# EAGLE board Board (EAGLE 9.6.2)
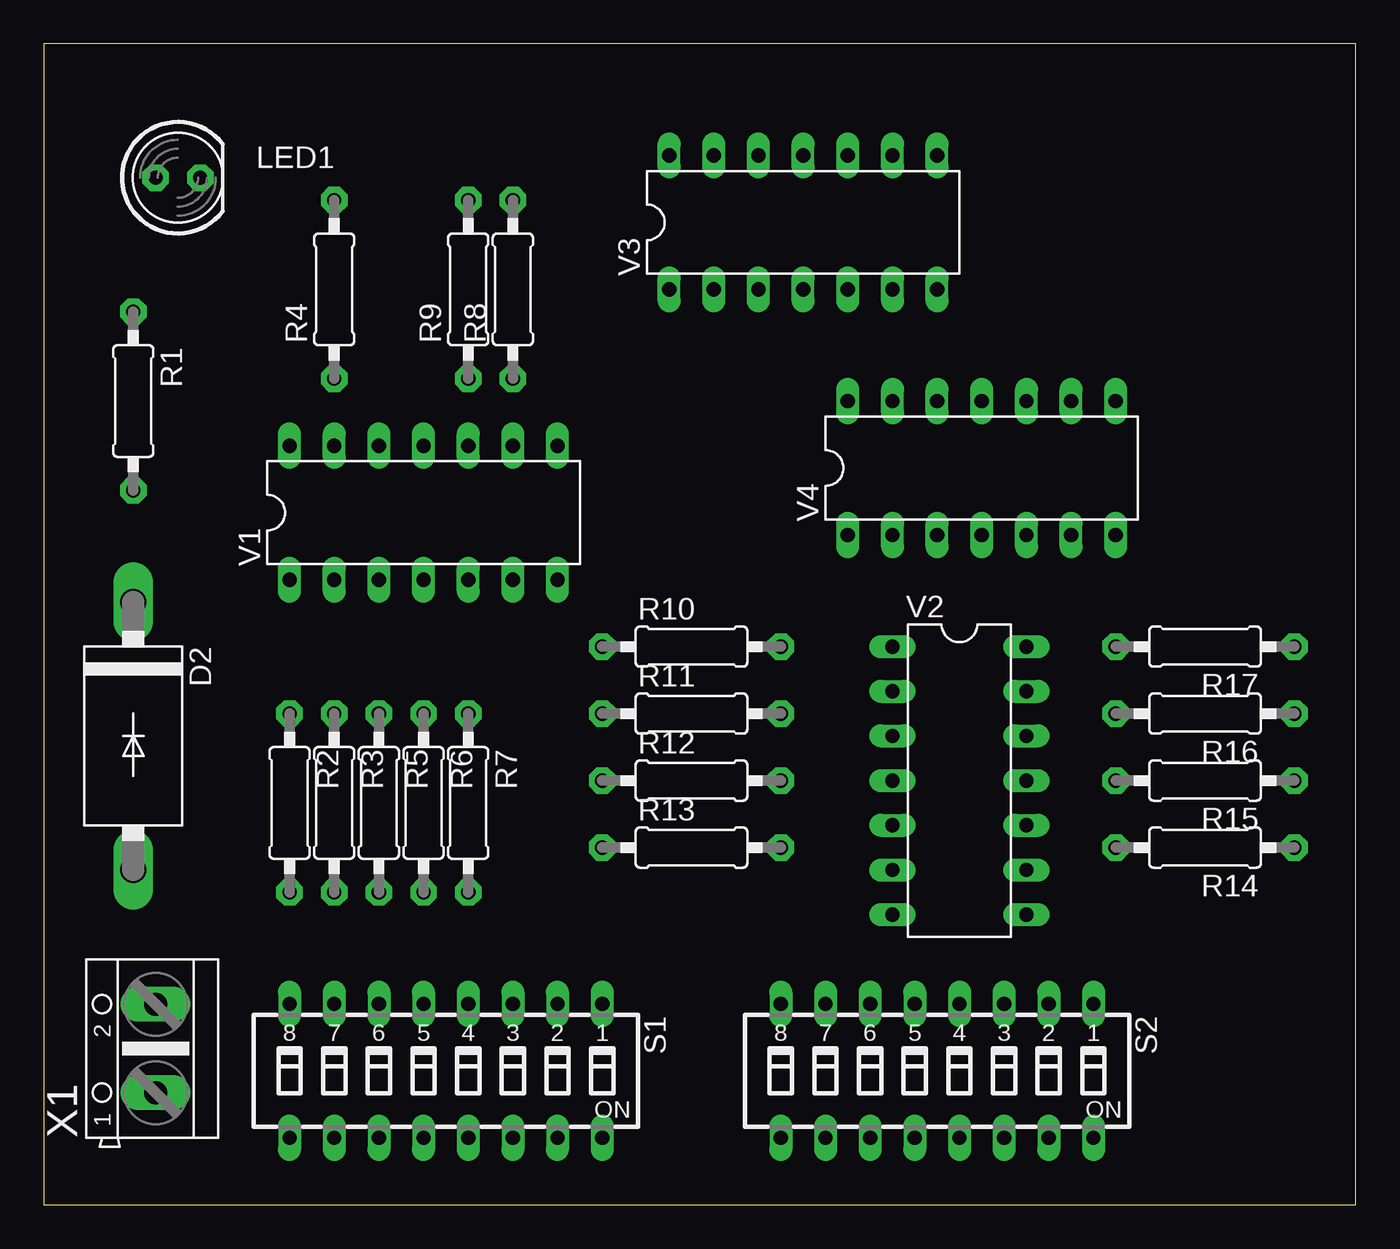
[diagram p0: board, top side]
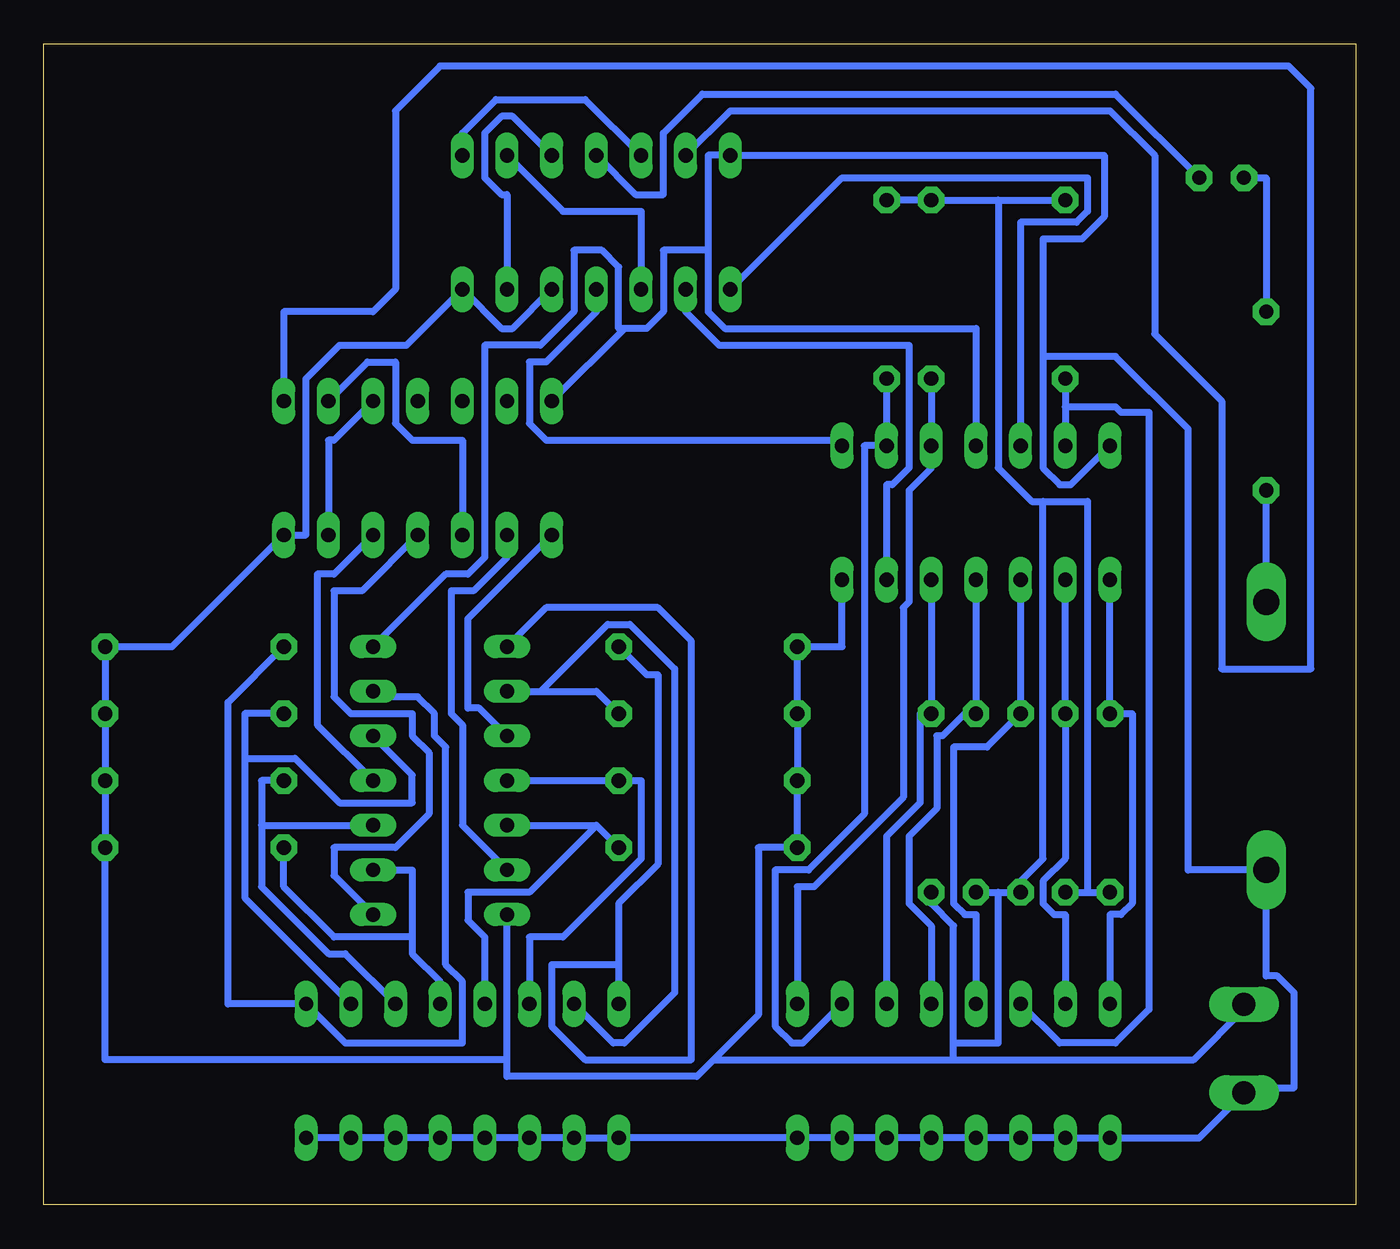
[diagram p1: board, bottom side, seen from below]

Size 74.6 x 66.03 mm. Coordinates in mm from the lower left corner, seen from the top.
Outline: 0,0 74.6,0 74.6,66.03 0,66.03 0,0
Copper layers (1*16): Top 0.035mm / dielectric 1.5mm / Bottom 0.035mm
Design rules "default *": minimum track width 0.4mm, minimum drill 0.35mm, track to track 0.4mm, track to pad 0.4mm, pad to pad 0.4mm, via to via 0.4mm, smd to smd 6mil, copper to edge 40mil, drill to drill 6mil, minimum pad ring 10mil, minimum via ring 8mil, stop-mask expansion 4mil, vias tented up to drill 0mil, thermal gap 10mil

## Footprints (pad centres in the part's own frame; a part is rotated, then mirrored left to right if it is on the bottom)
DO201-15 = drill 1.499 long: A 7.62,0; C -7.62,0
LED5MM = drill 0.813 octagon: A -1.27,0; K 1.27,0
0207/10 = drill 0.813 octagon: 1 -5.08,0; 2 5.08,0
SD4-08 = drill 0.813 long: 1 -8.89,-3.81; 2 -6.35,-3.81; 3 -3.81,-3.81; 4 -1.27,-3.81; 5 1.27,-3.81; 6 3.81,-3.81; 7 6.35,-3.81; 8 8.89,-3.81; 9 8.89,3.81; 10 6.35,3.81; 11 3.81,3.81; 12 1.27,3.81; 13 -1.27,3.81; 14 -3.81,3.81; 15 -6.35,3.81; 16 -8.89,3.81
DIL14 = drill 0.813 long: 1 -7.62,-3.81; 2 -5.08,-3.81; 3 -2.54,-3.81; 4 0,-3.81; 5 2.54,-3.81; 6 5.08,-3.81; 7 7.62,-3.81; 8 7.62,3.81; 9 5.08,3.81; 10 2.54,3.81; 11 0,3.81; 12 -2.54,3.81; 13 -5.08,3.81; 14 -7.62,3.81
AK500/2 = drill 1.321 long: 1 -2.515,0; 2 2.515,0

## Placement (x,y rotation side)
D2  1N5624  [DO201-15]  5.08,26.67 270 top
LED1  [LED5MM]  7.62,58.42 0 top
R1  [0207/10]  5.08,45.72 270 top
R2  [0207/10]  13.97,22.86 270 top
R3  [0207/10]  16.51,22.86 270 top
R4  [0207/10]  16.51,52.07 90 top
R5  [0207/10]  19.05,22.86 270 top
R6  [0207/10]  21.59,22.86 270 top
R7  [0207/10]  24.13,22.86 270 top
R8  [0207/10]  26.67,52.07 90 top
R9  [0207/10]  24.13,52.07 90 top
R10  [0207/10]  36.83,31.75 0 top
R11  [0207/10]  36.83,27.94 0 top
R12  [0207/10]  36.83,24.13 0 top
R13  [0207/10]  36.83,20.32 0 top
R14  [0207/10]  66.04,20.32 180 top
R15  [0207/10]  66.04,24.13 180 top
R16  [0207/10]  66.04,27.94 180 top
R17  [0207/10]  66.04,31.75 180 top
S1  [SD4-08]  22.86,7.62 180 top
S2  [SD4-08]  50.8,7.62 180 top
V1  7410N  [DIL14]  21.59,39.37 0 top
V2  7432N  [DIL14]  52.07,24.13 270 top
V3  7432N  [DIL14]  43.18,55.88 0 top
V4  7432N  [DIL14]  53.34,41.91 0 top
X1  [AK500/2]  6.35,8.89 90 top

## Library data of the parts
D2 = diode
LED1 = led
R1-R17 = rcl; SPICEPREFIX: R
S1 S2 = switch-dil; OC_FARNELL: unknown; OC_NEWARK: unknown
V1-V4 = 74ttl-din
X1 = con-ptr500; OC_FARNELL: unknown; OC_NEWARK: unknown

## Nets
+UB: D2.A S1.9 S1.10 S1.11 S1.12 S1.13 S1.14 S1.15 S1.16 S2.9 S2.10 S2.11 S2.12 S2.13 S2.14 S2.15 S2.16 V1.11 V1.14 V2.14 V3.14 V4.14 X1.1
-UB: R2.2 R3.2 R4.2 R5.2 R6.2 R7.2 R8.2 R9.2 R10.1 R11.1 R12.1 R13.1 R14.1 R15.1 R16.1 R17.1 V1.7 V2.7 V3.5 V3.7 V4.7 X1.2
A0: R2.1 S1.8 V1.1
A1: R3.1 S1.7 V1.2
A2: R10.2 S2.8 V2.1
A3: R11.2 S2.7 V2.2
A4: R12.2 S2.6 V2.4
A5: R4.1 S1.6 V1.13
A6: R13.2 S2.5 V2.5
A7: R14.2 S2.4 V2.9
A8: R5.1 S1.5 V1.3
A9: R6.1 S1.4 V1.4
A10: R7.1 S1.3 V1.5
A11: R8.1 S1.2 V1.9
A12: R9.1 S1.1 V1.10
A13: R15.2 S2.3 V2.10
A14: R16.2 S2.2 V2.12
A15: R17.2 S2.1 V2.13
N$1: LED1.K V3.11
N$2: LED1.A R1.1
N$3: D2.C R1.2
N$9: V2.3 V4.1
N$10: V2.6 V4.2
N$11: V2.8 V4.4
N$12: V2.11 V4.5
N$13: V4.3 V4.9
N$14: V4.6 V4.10
N$15: V1.12 V3.1
N$16: V1.6 V3.2
N$17: V1.8 V3.4
N$18: V3.3 V3.9
N$19: V3.6 V3.10
N$20: V3.8 V3.12
N$21: V3.13 V4.8

## Tracks (layer width: path | path; a pad name or v marks a point on that pad's centre or on a via)
+UB
  Bottom 0.4: V1.14 16.19,40.96 16.83,40.96 17.78,41.91 17.78,48.26 | 17.78,48.26 17.78,54.93 15.56,54.93 14.29,56.2 14.29,59.69 V3.14 36.83,59.69 36.83,54.29 | V1.11 21.59,49.85 35.88,49.85 36.83,50.8 36.83,54.29 | 41.59,49.85 V4.14 | 41.59,49.85 40.32,49.85 39.37,50.8 39.37,54.29 36.83,54.29 | V2.14 51.75,35.88 50.48,35.88 49.53,36.83 49.53,48.9 46.36,48.9 44.45,50.8 44.45,54.29 42.86,54.29 41.91,53.34 41.91,49.85 41.59,49.85 | S2.16 S2.15 S2.14 S2.13 S2.12 S2.11 S2.10 S2.9 S1.16 S1.15 S1.14 S1.13 S1.12 S1.11 S1.10 S1.9 8.89,3.81 6.35,6.35 X1.1 6.35,6.67 3.49,6.67 3.49,12.06 4.45,13.02 5.08,13.02 D2.A 9.53,19.05 9.53,44.13 13.65,48.26 17.78,48.26
-UB
  Bottom 0.4: V3.5 47.94,49.85 48.58,49.85 V3.7 53.97,48.9 57.78,48.9 59.69,46.99 59.69,38.1 V4.7 67.31,31.75 R17.1 R16.1 R15.1 R14.1 71.12,8.26 48.26,8.26 | R3.2 15.24,17.78 | 15.24,17.78 R2.2 | 20.32,57.15 R9.2 R8.2 | 20.32,57.15 R4.2 | 15.24,17.78 15.24,40.01 17.78,40.01 | 17.78,40.01 18.41,40.01 20.32,41.91 20.32,57.15 | V1.7 29.21,31.75 R10.1 R11.1 R12.1 R13.1 33.97,20.32 33.97,10.79 36.51,8.26 | R6.2 20.32,17.78 | 20.32,17.78 19.68,17.78 | 48.26,8.26 48.26,7.3 37.47,7.3 36.51,8.26 | 48.26,8.26 V2.7 | R7.2 24.13,17.15 22.86,15.87 22.86,9.21 | 22.86,8.26 22.86,9.21 | 36.51,8.26 22.86,8.26 | 20.32,17.78 20.32,9.21 22.86,9.21 | 22.86,8.26 9.21,8.26 6.35,11.11 X1.2 | 17.78,40.01 17.78,19.69 19.68,17.78 | 19.68,17.78 R5.2
A0
  Bottom 0.4: S1.8 13.97,16.51 13.34,16.51 12.7,17.15 12.7,27.94 R2.1 V1.1
A1
  Bottom 0.4: S1.7 16.51,16.51 17.14,16.51 17.78,17.15 17.78,18.41 16.51,19.69 R3.1 V1.2
A2
  Bottom 0.4: 41.91,13.65 41.91,17.15 39.69,19.37 39.69,30.16 40.32,30.16 R10.2 | 41.91,13.65 S2.8 | V2.1 46.04,33.97 39.69,33.97 37.78,32.07 37.78,8.26 43.81,8.26 45.72,10.16 45.72,13.65 41.91,13.65
A3
  Bottom 0.4: R11.2 43.18,29.21 46.36,29.21 | V2.2 46.36,29.21 | S2.7 42.23,9.21 41.59,9.21 38.73,12.06 38.73,30.48 41.28,33.02 42.55,33.02 46.36,29.21
A4
  Bottom 0.4: V2.4 R12.2 40.64,24.13 40.64,19.69 45.08,15.24 46.99,15.24 S2.6
A5
  Bottom 0.4: R4.1 16.51,45.4 | 16.51,45.4 V1.13 | S1.6 16.83,9.21 13.65,9.21 11.75,11.11 11.75,45.09 13.34,45.09 13.65,45.4 16.51,45.4
A6
  Bottom 0.4: 43.18,21.59 R13.2 | V2.5 43.18,21.59 | S2.5 49.53,15.24 50.48,16.19 50.48,17.78 46.99,17.78 43.18,21.59
A7
  Bottom 0.4: S2.4 52.07,12.7 53.66,14.29 53.66,15.24 | 53.66,15.24 53.66,19.05 V2.9 | R14.2 60.96,18.1 58.1,15.24 53.66,15.24
A8
  Bottom 0.4: V1.3 R5.1 20.96,26.03 22.86,26.03 22.86,17.15 22.22,16.51 21.59,16.51 S1.5
A9
  Bottom 0.4: V1.4 R6.1 22.22,27.94 23.5,26.67 23.81,26.67 23.81,22.54 25.4,20.95 25.4,17.15 24.13,15.87 S1.4
A10
  Bottom 0.4: V1.5 R7.1 24.77,27.94 24.77,22.86 26.67,20.95 S1.3
A11
  Bottom 0.4: R8.1 V1.9 27.94,43.18 27.94,22.23 31.11,19.05 33.02,19.05 33.02,10.16 32.07,9.21 31.43,9.21 S1.2
A12
  Bottom 0.4: R9.1 V1.10 24.13,41.91 25.4,40.64 25.4,34.29 25.72,33.97 25.72,23.18 30.8,18.1 31.75,18.1 S1.1
A13
  Bottom 0.4: S2.3 57.47,14.29 58.42,14.29 62.23,18.1 62.23,21.59 | 62.23,21.59 62.23,24.13 R15.2 | 62.23,21.59 V2.10
A14
  Bottom 0.4: S2.2 63.18,17.46 63.18,25.4 | 63.18,25.4 63.18,27.94 R16.2 | V2.12 53.66,24.45 53.66,22.86 57.78,22.86 60.33,25.4 63.18,25.4
A15
  Bottom 0.4: V2.13 55.56,28.89 53.34,28.89 52.39,27.94 52.39,26.67 51.75,26.03 51.75,13.65 50.8,12.7 50.8,9.21 57.47,9.21 S2.1 64.13,11.43 64.13,28.58 R17.2
N$1
  Bottom 0.4: LED1.K 13.65,63.18 37.15,63.18 39.37,60.96 39.37,57.47 40.96,57.47 V3.11
N$2
  Bottom 0.4: R1.1 5.08,58.42 LED1.A
N$3
  Bottom 0.4: D2.C R1.2
N$4  (via drill 0.8 pad 1.5)
  other vias: 13.97,27.94
N$5  (via drill 0.8 pad 1.5)
  other vias: 19.05,27.94
N$6  (via drill 0.8 pad 1.5)
  other vias: 16.51,27.94
N$7  (via drill 0.8 pad 1.5)
  other vias: 19.05,17.78
N$8  (via drill 0.8 pad 1.5)
  other vias: 16.51,17.78
N$9
  Bottom 0.4: V4.1 50.48,33.34 50.48,28.26 49.85,28.26 V2.3
N$10
  Bottom 0.4: V2.6 50.8,21.59 50.8,27.3 51.44,27.94 51.44,34.93 50.17,34.93 48.26,36.83 V4.2
N$11
  Bottom 0.4: V2.8 58.1,18.73 58.1,20.32 54.61,20.32 52.7,22.23 52.7,25.72 53.66,26.67 53.66,27.94 57.15,27.94 58.1,28.89 58.1,34.93 56.52,34.93 V4.4
N$12
  Bottom 0.4: V2.11 59.05,27.3 59.05,35.88 58.1,35.88 V4.5
N$13
  Bottom 0.4: V4.3 50.8,43.5 53.66,43.5 54.61,44.45 54.61,47.94 56.2,47.94 V4.9
N$14
  Bottom 0.4: V4.6 58.42,43.5 58.1,43.5 V4.10
N$15
  Bottom 0.4: V1.12 19.05,55.88 15.88,55.88 15.24,56.52 15.24,58.42 29.21,58.42 V3.1
N$16
  Bottom 0.4: V1.6 26.67,40.96 26.35,40.96 25.4,41.91 25.4,48.9 36.2,48.9 38.1,50.8 V3.2
N$17
  Bottom 0.4: V1.8 29.53,43.5 46.04,43.5 46.99,44.45 46.99,47.94 46.04,47.94 43.18,50.8 V3.4
N$18
  Bottom 0.4: V3.3 40.64,56.52 45.08,56.52 V3.9
N$19
  Bottom 0.4: V3.6 48.26,57.47 48.58,57.47 49.53,58.42 49.53,60.96 48.58,61.91 47.94,61.91 V3.10
N$20
  Bottom 0.4: V3.12 43.81,62.86 48.89,62.86 50.8,60.96 V3.8
N$21
  Bottom 0.4: V3.13 35.56,62.23 13.97,62.23 11.43,59.69 11.43,49.53 7.62,45.72 7.62,30.48 2.54,30.48 2.54,63.5 3.81,64.77 52.07,64.77 54.61,62.23 54.61,52.07 55.88,50.8 60.96,50.8 V4.8
N$22  (via drill 0.8 pad 1.5)
  other vias: 13.97,17.78
N$23  (via drill 0.8 pad 1.5)
  other vias: 24.13,27.94
N$24  (via drill 0.8 pad 1.5)
  other vias: 21.59,27.94
N$25  (via drill 0.8 pad 1.5)
  other vias: 24.13,17.78
N$26  (via drill 0.8 pad 1.5)
  other vias: 21.59,17.78
N$27  (via drill 0.8 pad 1.5)
  other vias: 31.75,20.32
N$28  (via drill 0.8 pad 1.5)
  other vias: 31.75,24.13
N$29  (via drill 0.8 pad 1.5)
  other vias: 31.75,27.94
N$30  (via drill 0.8 pad 1.5)
  other vias: 31.75,31.75
N$31  (via drill 0.8 pad 1.5)
  other vias: 41.91,31.75
N$32  (via drill 0.8 pad 1.5)
  other vias: 41.91,27.94
N$33  (via drill 0.8 pad 1.5)
  other vias: 41.91,24.13
N$34  (via drill 0.8 pad 1.5)
  other vias: 60.96,24.13
N$35  (via drill 0.8 pad 1.5)
  other vias: 60.96,27.94
N$36  (via drill 0.8 pad 1.5)
  other vias: 60.96,31.75
N$37  (via drill 0.8 pad 1.5)
  other vias: 60.96,20.32
N$38  (via drill 0.8 pad 1.5)
  other vias: 41.91,20.32
N$39  (via drill 0.8 pad 1.5)
  other vias: 71.12,31.75
N$40  (via drill 0.8 pad 1.5)
  other vias: 26.67,57.15
N$41  (via drill 0.8 pad 1.5)
  other vias: 16.51,46.99
N$42  (via drill 0.8 pad 1.5)
  other vias: 5.08,50.8
N$43  (via drill 0.8 pad 1.5)
  other vias: 71.12,20.32
N$44  (via drill 0.8 pad 1.5)
  other vias: 5.08,40.64
N$45  (via drill 0.8 pad 1.5)
  other vias: 26.67,46.99
N$46  (via drill 0.8 pad 1.5)
  other vias: 16.51,57.15
N$47  (via drill 0.8 pad 1.5)
  other vias: 24.13,57.15
N$48  (via drill 0.8 pad 1.5)
  other vias: 24.13,46.99
N$49  (via drill 0.8 pad 1.5)
  other vias: 71.12,24.13
N$50  (via drill 0.8 pad 1.5)
  other vias: 71.12,27.94
N$51  (via drill 0.8 pad 1.5)
  other vias: 8.89,58.42
N$52  (via drill 0.8 pad 1.5)
  other vias: 6.35,58.42